# Altium PCB Base_borne_conn.PcbDoc
Units mm, origin at the board's own origin, x right, y up, seen from the top; angles counter-clockwise.
Board outline 145 x 175 mm, 2 copper layers (Top Layer, Bottom Layer), stack 0.81 mm thick; 5 components, 18 nets, 69 pads, 1 vias.
Unrouted connection lines stored in the file: 8.
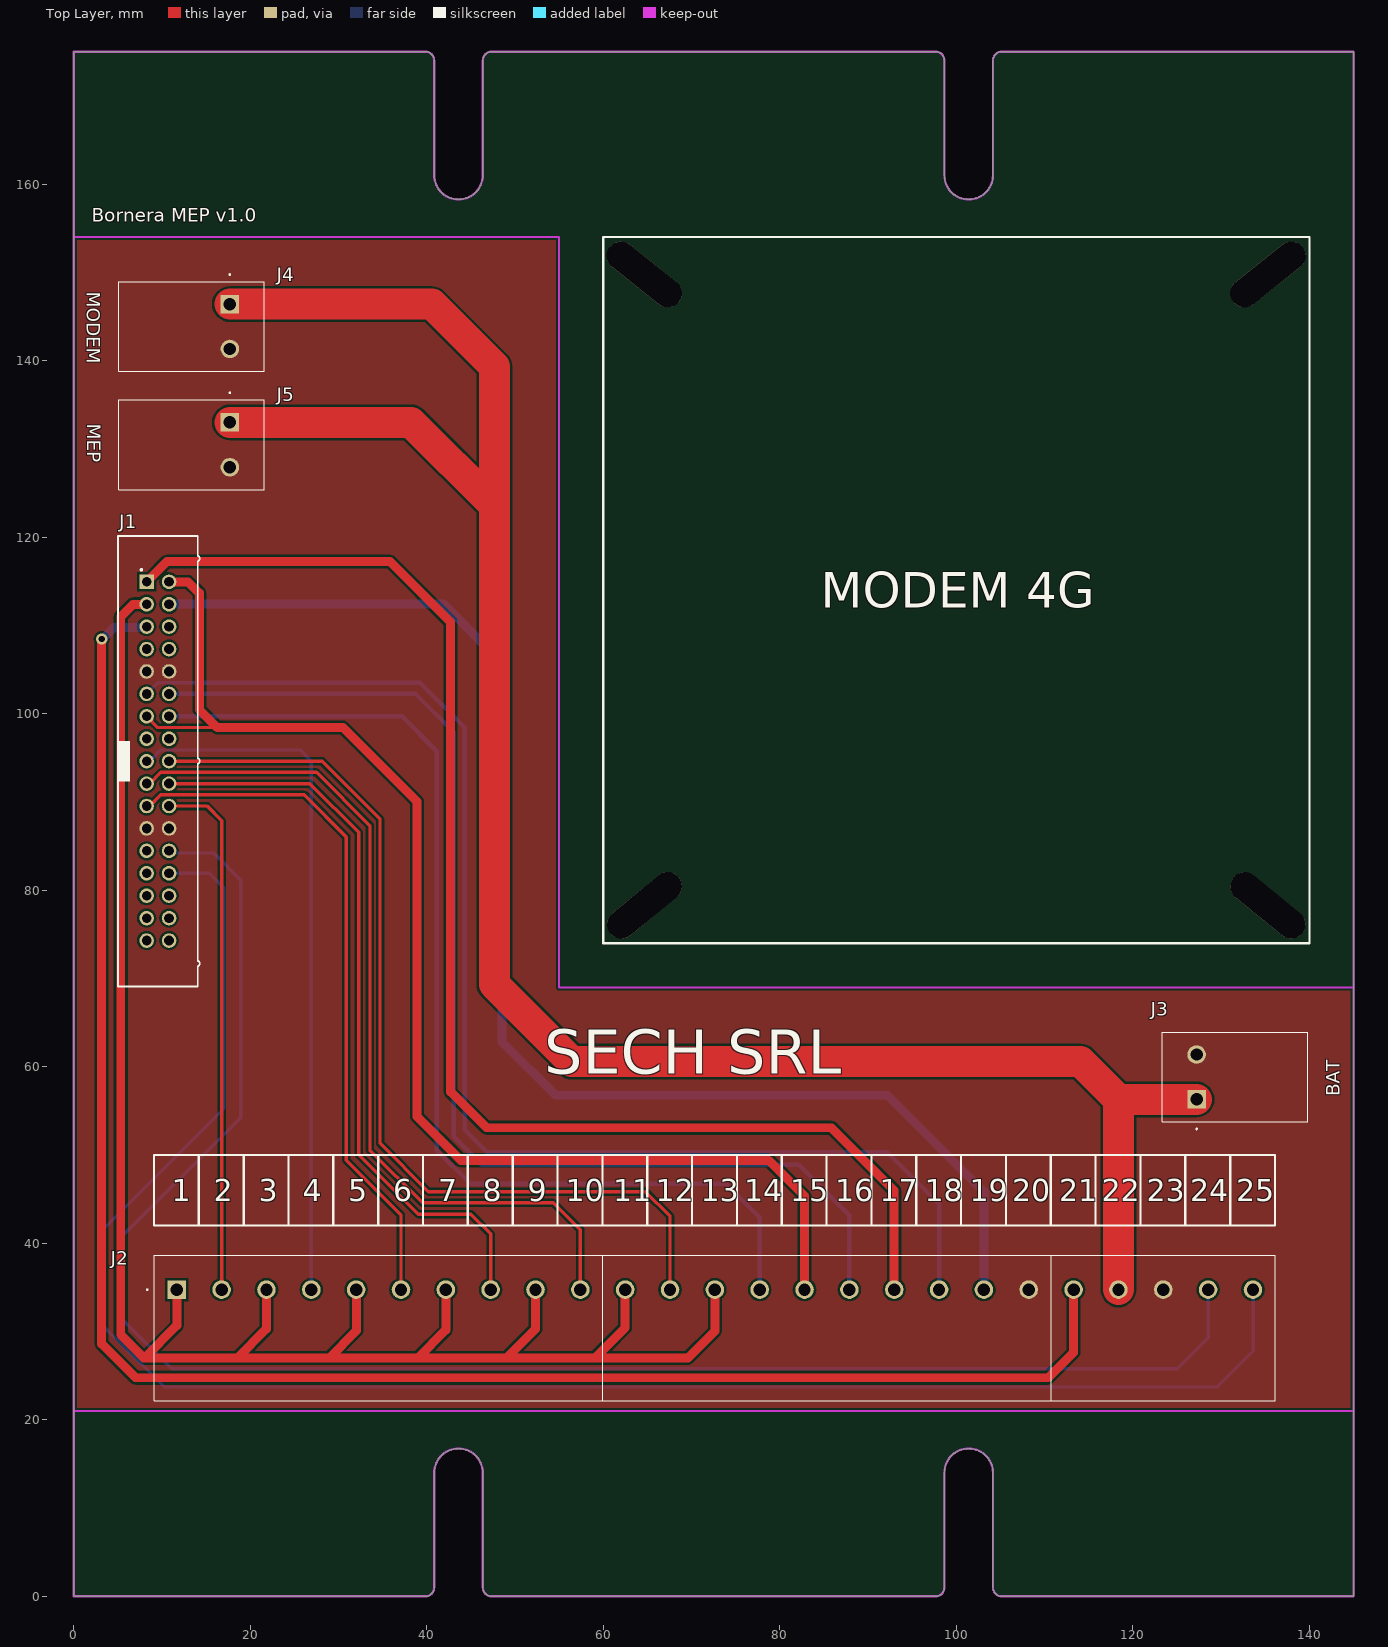
[diagram p0: Top Layer view]
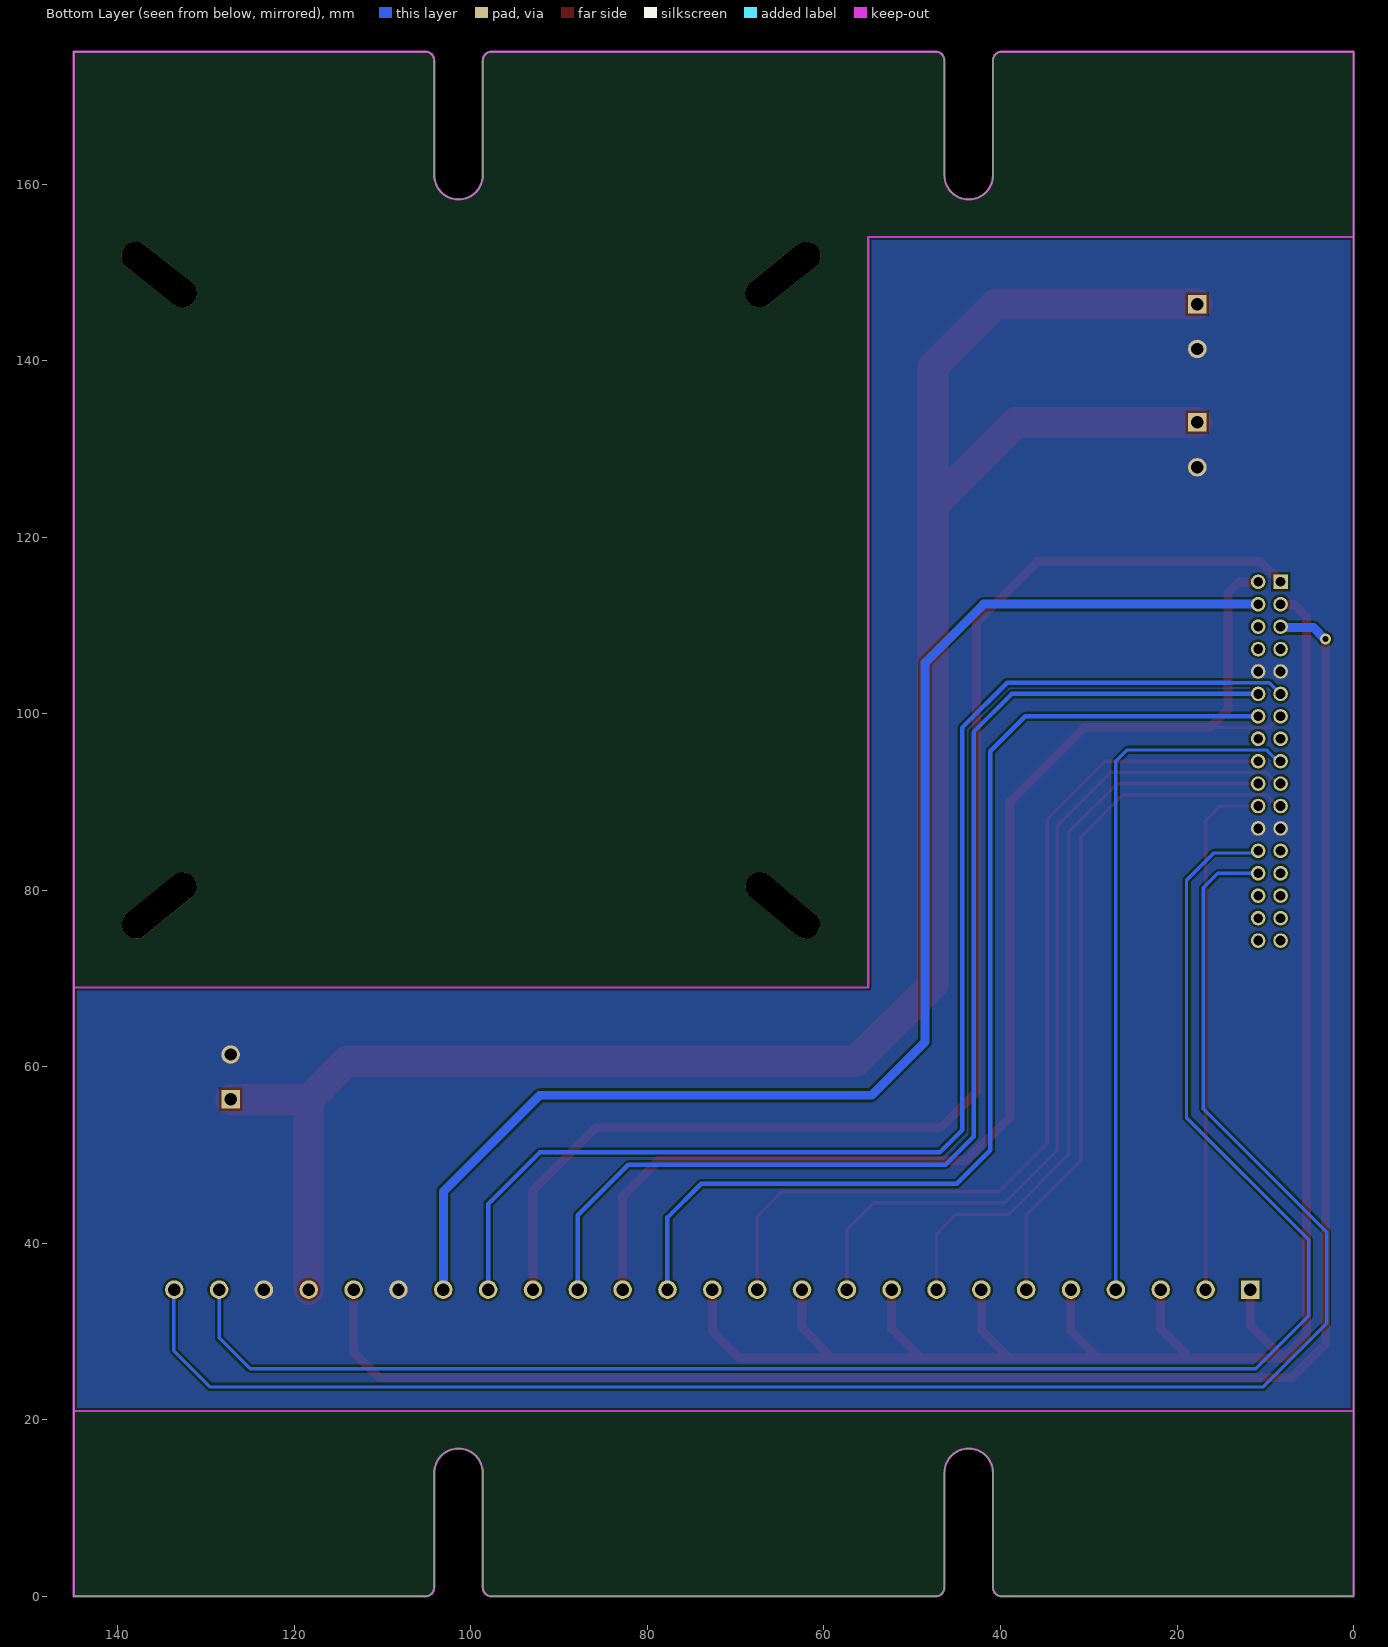
[diagram p1: Bottom Layer view, seen from below]

## Layer stack, top to bottom
Top Solder: solder mask 0.01, Solder Resist, Dk 3.5
Top Layer: signal copper 0.035
Dielectric 1: dielectric 0.74, FR-4, Dk 4.2
Bottom Layer: signal copper 0.035
Bottom Solder: solder mask 0.01, Solder Resist, Dk 3.5

## Board outline
0,0 39.85,0 ccw(c39.85,1) 40.85,1 40.85,14 cw(c43.6,14) 46.35,14 46.35,1 ccw(c47.35,1) 47.35,0 97.65,0 ccw(c97.65,1) 98.65,1 98.65,14 cw(c101.4,14) 104.15,14 104.15,1 ccw(c105.15,1) 105.15,0 145,0 145,175 105.15,175 ccw(c105.15,174) 104.15,174 104.15,161 cw(c101.4,161) 98.65,161 98.65,174 ccw(c97.65,174) 97.65,175 47.35,175 ccw(c47.35,174) 46.35,174 46.35,161 cw(c43.6,161) 40.85,161 40.85,174 ccw(c39.85,174) 39.85,175 0,175

## Design rules (kind name [scope] priority, off if disabled: settings)
Clearance [All] p1: gap=0.254 ignorepadtopadclearanceinfootprint=FALSE except(0: Arc-Hole Track-Hole SMDPad-Hole THPad-Hole Via-Hole Fill-Hole Poly-Hole Region-Hole Text-Hole)
PolygonConnect [All] p1: connectstyle=Direct reliefconductorwidth=0.254 reliefentries=4 polygonreliefangle="90 Angle" airgapwidth=0.254
RoutingVias [All] p1: holewidth=0.711 width=1.27 viastyle="Through Hole" minholewidth=0.711 minwidth=1.27 maxholewidth=0.711 maxwidth=1.27
SolderMaskExpansion [All] p1: expansion=0.102 istentingtop=FALSE
SupplyNets "Schematic Supply Nets_1" [InNet('GND')] p1: voltage=0,000
SupplyNets "Schematic Supply Nets" [InNet('+24')] p2: voltage=0,000
Width Width_24V [InNetClass('24V')] p1: maxlimit=3.5 minlimit=0.381 preferedwidth=1.016 minimp=50.000000 maximp=50.000000 favimp=50.000000
Width Width_AnalogIn [InNetClass('AnalogIn')] p2: maxlimit=0.508 minlimit=0.381 preferedwidth=0.508
Width Width_DigitalIn [InNetClass('DigitalIn')] p3: maxlimit=0.508 minlimit=0.381 preferedwidth=0.381
Width [All] p4: maxlimit=0.254 minlimit=0.254 preferedwidth=0.254
30 further rules are at their usual default settings.

## Classes and differential pairs
net class AnalogIn: AUX PTA PTB
net class DigitalIn: PSH PSL RS485-A RS485-B SMM SMP ZSA ZSC
net class 24V: 24V-A 24V-B 24V-UI +24 EVC WKUP
component class Base_borne_conn: J2 J3 J4 J5

## Components (designator, comment, footprint, x,y, rotation, side; value= is the part's Value field where it differs from the comment)
J1 "6120XX21621_61203421621" 61203421621 9.538,94.618 r270 top
J2 "1769-25" 1769-25 0,5.667 r0 top
J3 "BAT" 1769463 127.217,56.3 r90 top
J4 "MODEM" 1769463 17.701,146.4 r270 top
J5 "MEP" 1769463 17.701,133 r270 top

## Footprints (in the part's own frame and the unit in brackets; to place one, negate y for a bottom-side part, rotate by r counter-clockwise, add the part's x,y. Pads: shape width x height; smd on the part's side, far side on the other; paste and mask are expansions set on the pad)
1769-25 [mm]
  rect 2.1x2.1 hole 1.4: 1(11.684,29.083)
  round 2.1 hole 1.4: 2(16.764,29.083) 3(21.844,29.083) 4(26.924,29.083) 5(32.004,29.083) 6(37.084,29.083) 7(42.164,29.083) 8(47.244,29.083) 9(52.324,29.083) 10(57.404,29.083) 11(62.484,29.083) 12(67.564,29.083) 13(72.644,29.083) 14(77.724,29.083) 15(82.804,29.083) 16(87.884,29.083) 17(92.964,29.083) 18(98.044,29.083) 19(103.124,29.083) 20(108.204,29.083) 21(113.284,29.083) 22(118.364,29.083) 23(123.444,29.083) 24(128.524,29.083) 25(133.604,29.083)
  silkscreen extent 8.28,16.48 136.14,32.98, body extent 9.14,16.5 136.14,33.27, height 15.31
1769463 [mm]
  rect 2.1x2.1 hole 1.4: 1(0,0)
  round 2.1 hole 1.4: 2(5.08,0)
  silkscreen extent -3.4,-12.6 7.62,3.9, body extent -2.54,-12.7 7.62,4.07, height 15.31
61203421621 [mm]
  rect 1.65x1.65 hole 1.1: 1(-20.32,-1.27)
  round 1.65 hole 1.1: 2(-20.32,1.27) 3(-17.78,-1.27) 4(-17.78,1.27) 5(-15.24,-1.27) 6(-15.24,1.27) 7(-12.7,-1.27) 8(-12.7,1.27) 9(-10.16,-1.27) 10(-10.16,1.27) 11(-7.62,-1.27) 12(-7.62,1.27) 13(-5.08,-1.27) 14(-5.08,1.27) 15(-2.54,-1.27) 16(-2.54,1.27) 17(0,-1.27) 18(0,1.27) 19(2.54,-1.27) 20(2.54,1.27) 21(5.08,-1.27) 22(5.08,1.27) 23(7.62,-1.27) 24(7.62,1.27) 25(10.16,-1.27) 26(10.16,1.27) 27(12.7,-1.27) 28(12.7,1.27) 29(15.24,-1.27) 30(15.24,1.27) 31(17.78,-1.27) 32(17.78,1.27) 33(20.32,-1.27) 34(20.32,1.27)
  silkscreen extent -25.52,-4.53 25.52,4.74, body extent -25.42,-4.45 25.42,4.73, height 9

## Part data
J1: "34 pins, straight, gold plating", Package=None, Check_prices=https://www.snapeda.com/parts/61203421621/Wurth+Electronics/view-part/?ref=eda, MF="Wurth Electronics", MP=61203421621, SnapEDA_Link=https://www.snapeda.com/parts/61203421621/Wurth+Electronics/view-part/?ref=snap
J3: library part 1769463_1, "Connector", Manufacturer_Name="Phoenix Contact", Manufacturer_Part_Number=1769463, Datasheet Link=https://www.phoenixcontact.com/en-us/products/pcb-header-smstb-25-2-g-508-1769463?type=pdf, Height=14.95mm
J4: library part 1769463_2, "Connector", Manufacturer_Name="Phoenix Contact", Manufacturer_Part_Number=1769463, Datasheet Link=https://www.phoenixcontact.com/en-us/products/pcb-header-smstb-25-2-g-508-1769463?type=pdf, Height=14.95mm
J5: library part 1769463, "Connector", Manufacturer_Name="Phoenix Contact", Datasheet Link=https://www.phoenixcontact.com/en-us/products/pcb-header-smstb-25-2-g-508-1769463?type=pdf, Height=14.95mm, Manufacturer_Part_Number=1769463

## Free pads (board coordinates)
  oval 10x3.2 hole 3.2 slot 10 at 141.4 deg unplated rot 141.4: 16(64.657,149.758)
  oval 10x3.2 hole 3.2 slot 10 at 39.6 deg unplated rot 39.6: 16(64.66,78.285)
  oval 10x3.2 hole 3.2 slot 10 at 140.8 deg unplated rot 140.8: 16(135.307,78.285)
  oval 10x3.2 hole 3.2 slot 10 at 38.4 deg unplated rot 38.4: 16(135.307,149.758)

## Via types
v1: diameter 1.27, hole 0.711, Top Layer to Bottom Layer, 1 vias

## Nets (pads, with @x,y where several pads share a name; then routed paths per layer and width w, separated by ;. In a path a pad name is that pad's centre, name@x,y a point inside that pad or via, vN(x,y) a via of type N, cw(c..) or ccw(c..) an arc to the next point about the centre after c; other vN are vias at no path point)
24V-A: J1.1 J2.17 | length 157.5
  Top Layer w1.016: J1.1 10.551,117.221 35.853,117.221 42.711,110.363 42.711,57.15 46.775,53.086 85.852,53.086 92.964,45.974 J2.17
24V-B: J1.2 J1.13 J2.15 | length 148.6
  Top Layer w0.381: J1.13 9.538,98.428 16.269,98.428
  Top Layer w1.016: J1.2 12.951,114.938 14.237,113.652 14.237,100.46 16.269,98.428 30.516,98.428 38.901,90.043 38.901,54.356 43.854,49.403 78.74,49.403 82.804,45.339 J2.15
24V-UI: J1.3 J2.1 J2.3 J2.5 J2.7 J2.9 J2.11 J2.13 | length 214.1
  Top Layer w1.016: J1.3 8.263,112.393 6.729,112.393 5.334,110.998 5.334,29.638 7.981,26.992 ; J2.1 11.684,30.695 7.981,26.992 ; J2.3 21.844,30.314 18.522,26.992 ; J2.5@32.043,34.75 32.043,30.099 28.936,26.992 ; J2.7 42.164,30.187 38.969,26.992 ; J2.9 52.324,30.314 49.002,26.992 ; J2.11 62.484,30.441 59.035,26.992 ; J2.13 72.644,30.06 69.576,26.992 59.035,26.992 ; 7.981,26.992 18.522,26.992 ; 18.522,26.992 28.936,26.992 ; 28.936,26.992 38.969,26.992 ; 38.969,26.992 49.002,26.992 ; 49.002,26.992 59.035,26.992
+24: J2.22 J3.1 J4.1 J5.1 | length 243.2
  Top Layer w3.5: J5.1 38.235,133 47.664,123.571 ; J4.1 40.583,146.4 47.664,139.319 47.664,123.571 ; J2.22 118.364,56.3 ; J3.1 118.364,56.3 ; 47.664,123.571 47.664,69.342 56.427,60.579 114.085,60.579 118.364,56.3
AUX: J1.14 J2.14 | length 125.1
  Bottom Layer w0.508: J1.14 37.208,99.698 41.148,95.758 41.148,50.546 44.958,46.736 73.914,46.736 77.724,42.926 J2.14
EVC: J1.4 J2.19 | length 156.1
  Bottom Layer w1.016: J1.4 41.907,112.398 48.526,105.779 48.526,62.853 54.61,56.769 92.202,56.769 103.124,45.847 J2.19
GND: J1.9 J1.10 J1.23 J1.24 J2.20 J2.23 J3.2 J4.2 J5.2
PSH: J1.22 J2.2 | length 59.8
  Top Layer w0.381: J1.22 15.11,89.538 16.764,87.884 J2.2
PSL: J1.17 J2.4 | length 79.8
  Bottom Layer w0.381: J1.17@8.434,94.452 J1.17 8.611,94.618 9.881,95.887 25.652,95.887 26.924,94.615 J2.4
PTA: J1.11 J2.18 | length 151.2
  Bottom Layer w0.381: J1.11 9.538,103.508 13.983,103.508
  Bottom Layer w0.508: 13.983,103.508 39.24,103.508 44.323,98.425 44.323,52.832 46.863,50.292 92.202,50.292 98.044,44.45 J2.18
PTB: J1.12 J2.16 | length 136.8
  Bottom Layer w0.508: J1.12 38.732,102.238 43.053,97.917 43.053,52.07 46.228,48.895 82.169,48.895 87.884,43.18 J2.16
RS485-A: J1.26 J2.24 | length 197.4
  Bottom Layer w0.381: J1.26 11.051,84.215 15.861,84.215 18.923,81.153 18.923,54.238 5.08,40.395 5.08,31.796 11.095,25.781 125.014,25.781 128.524,29.291 J2.24
RS485-B: J1.28 J2.25 | length 204.3
  Bottom Layer w0.381: J1.28 15.364,81.918 17.018,80.264 17.018,55.245 3.021,41.248 3.021,30.943 10.242,23.722 129.559,23.722 133.643,27.806 J2.25@133.643,34.75
SMM: J1.21 J2.6 | length 79
  Top Layer w0.381: J1.21 8.611,89.538 9.881,90.807 26.121,90.807 30.9,86.028 30.9,49.403 37.084,43.219 J2.6
SMP: J1.20 J2.8 | length 85.3
  Top Layer w0.381: J1.20 26.764,92.078 32.297,86.545 32.297,50.038 39.028,43.307 44.997,43.307 47.244,41.06 J2.8
WKUP: J1.5 J2.21 | length 205.5
  Top Layer w1.016: v1(3.175,108.458) 3.175,28.614 7.024,24.765 110.402,24.765 113.284,27.647 J2.21
  Bottom Layer w1.016: v1(3.175,108.458) 3.244,108.458 4.522,109.737 8.147,109.737 J1.5
ZSA: J1.19 J2.10 | length 99.4
  Top Layer w0.381: J1.19 8.611,92.078 9.881,93.347 27.518,93.347 33.567,87.298 33.567,50.546 39.536,44.577 54.356,44.577 57.404,41.529 J2.10
ZSC: J1.18 J2.12 | length 107.9
  Top Layer w0.381: J1.18 28.152,94.618 34.71,88.06 34.71,51.308 40.171,45.847 64.77,45.847 67.564,43.053 J2.12
pads on no net: J1.6 J1.7 J1.8 J1.15 J1.16 J1.25 J1.27 J1.29 J1.30 J1.31 J1.32 J1.33 J1.34

## Polygon pours and split planes (outlines as drawn)
GND on Bottom Layer "NONET_L-01_P-001" (solid, remove dead copper, pour order 1): 0,21 0,154 54.99,154 54.99,68.991 145,68.991 145,21
GND on Top Layer "NONET_L-01_P-001" (solid, remove dead copper, pour order 0): 0,21 0,154 54.99,154 54.99,68.991 145,68.991 145,21

## Keep-outs
Top Layer:
  lines w0.254: 0,21 0,154 54.99,154 54.99,68.991 145,68.991 145,21 0,21 ; 0,21 0,21
Bottom Layer:
  lines w0.254: 0,21 0,154 54.99,154 54.99,68.991 145,68.991 145,21 0,21
Keep-Out Layer:
  the board outline again, w0.254

## Silkscreen, mask and mechanical layers (free items; w line width, h text height)
Top Overlay:
  lines w0.254: 19.26,42 19.26,50 ; 24.34,42 24.34,50 ; 29.42,42 29.42,50 ; 34.5,42 34.5,50 ; 39.58,42 39.58,50 ; 44.66,42 44.66,50 ; 49.74,42 49.74,50 ; 54.82,42 54.82,50 ; 59.9,42 59.9,50 ; 64.98,42 64.98,50 ; 70.06,42 70.06,50 ; 75.14,42 75.14,50 ; 80.22,42 80.22,50 ; 85.3,42 85.3,50 ; 90.38,42 90.38,50 ; 95.46,42 95.46,50 ; 100.54,42 100.54,50 ; 105.62,42 105.62,50 ; 115.78,42 115.78,50 ; 120.86,42 120.86,50 ; 125.94,42 125.94,50 ; 131.02,42 131.02,50 ; 9.1,42 136.1,42 136.1,50 9.1,50 9.1,42 ; 14.18,42 14.18,50 14.18,42 ; 59.99,73.991 140,73.991 140,154.001 59.99,154.001 59.99,73.991 ; 110.7,42 110.7,50 110.7,42
  text "Bornera MEP v1.0" at 2.032,155.702 h1.52
  text "MODEM 4G" at 84.662,111.992 h4
  text "SECH SRL" at 53.34,59.223 h5
  text "1" at 11.104,44.75 h2.5
  text "2" at 15.887,44.75 h2.5
  text "3" at 20.967,44.75 h2.5
  text "4" at 25.928,44.75 h2.5
  text "5" at 31.127,44.75 h2.5
  text "6" at 36.207,44.75 h2.5
  text "7" at 41.287,44.75 h2.5
  text "8" at 46.367,44.75 h2.5
  text "9" at 51.447,44.75 h2.5
  text "10" at 55.777,44.75 h2.5
  text "11" at 61.155,44.75 h2.5
  text "12" at 65.937,44.75 h2.5
  text "13" at 71.017,44.75 h2.5
  text "14" at 75.978,44.75 h2.5
  text "15" at 81.177,44.75 h2.5
  text "16" at 86.257,44.75 h2.5
  text "17" at 91.337,44.75 h2.5
  text "18" at 96.417,44.75 h2.5
  text "19" at 101.497,44.75 h2.5
  text "20" at 106.309,44.75 h2.5
  text "21" at 111.687,44.75 h2.5
  text "22" at 116.469,44.75 h2.5
  text "23" at 121.549,44.75 h2.5
  text "24" at 126.51,44.75 h2.5
  text "25" at 131.709,44.75 h2.5
Mechanical 15:
  lines w0.254: 59.99,73.991 140,73.991 140,154.001 59.99,154.001 59.99,73.991